# EAGLE board Led (EAGLE 5.06)
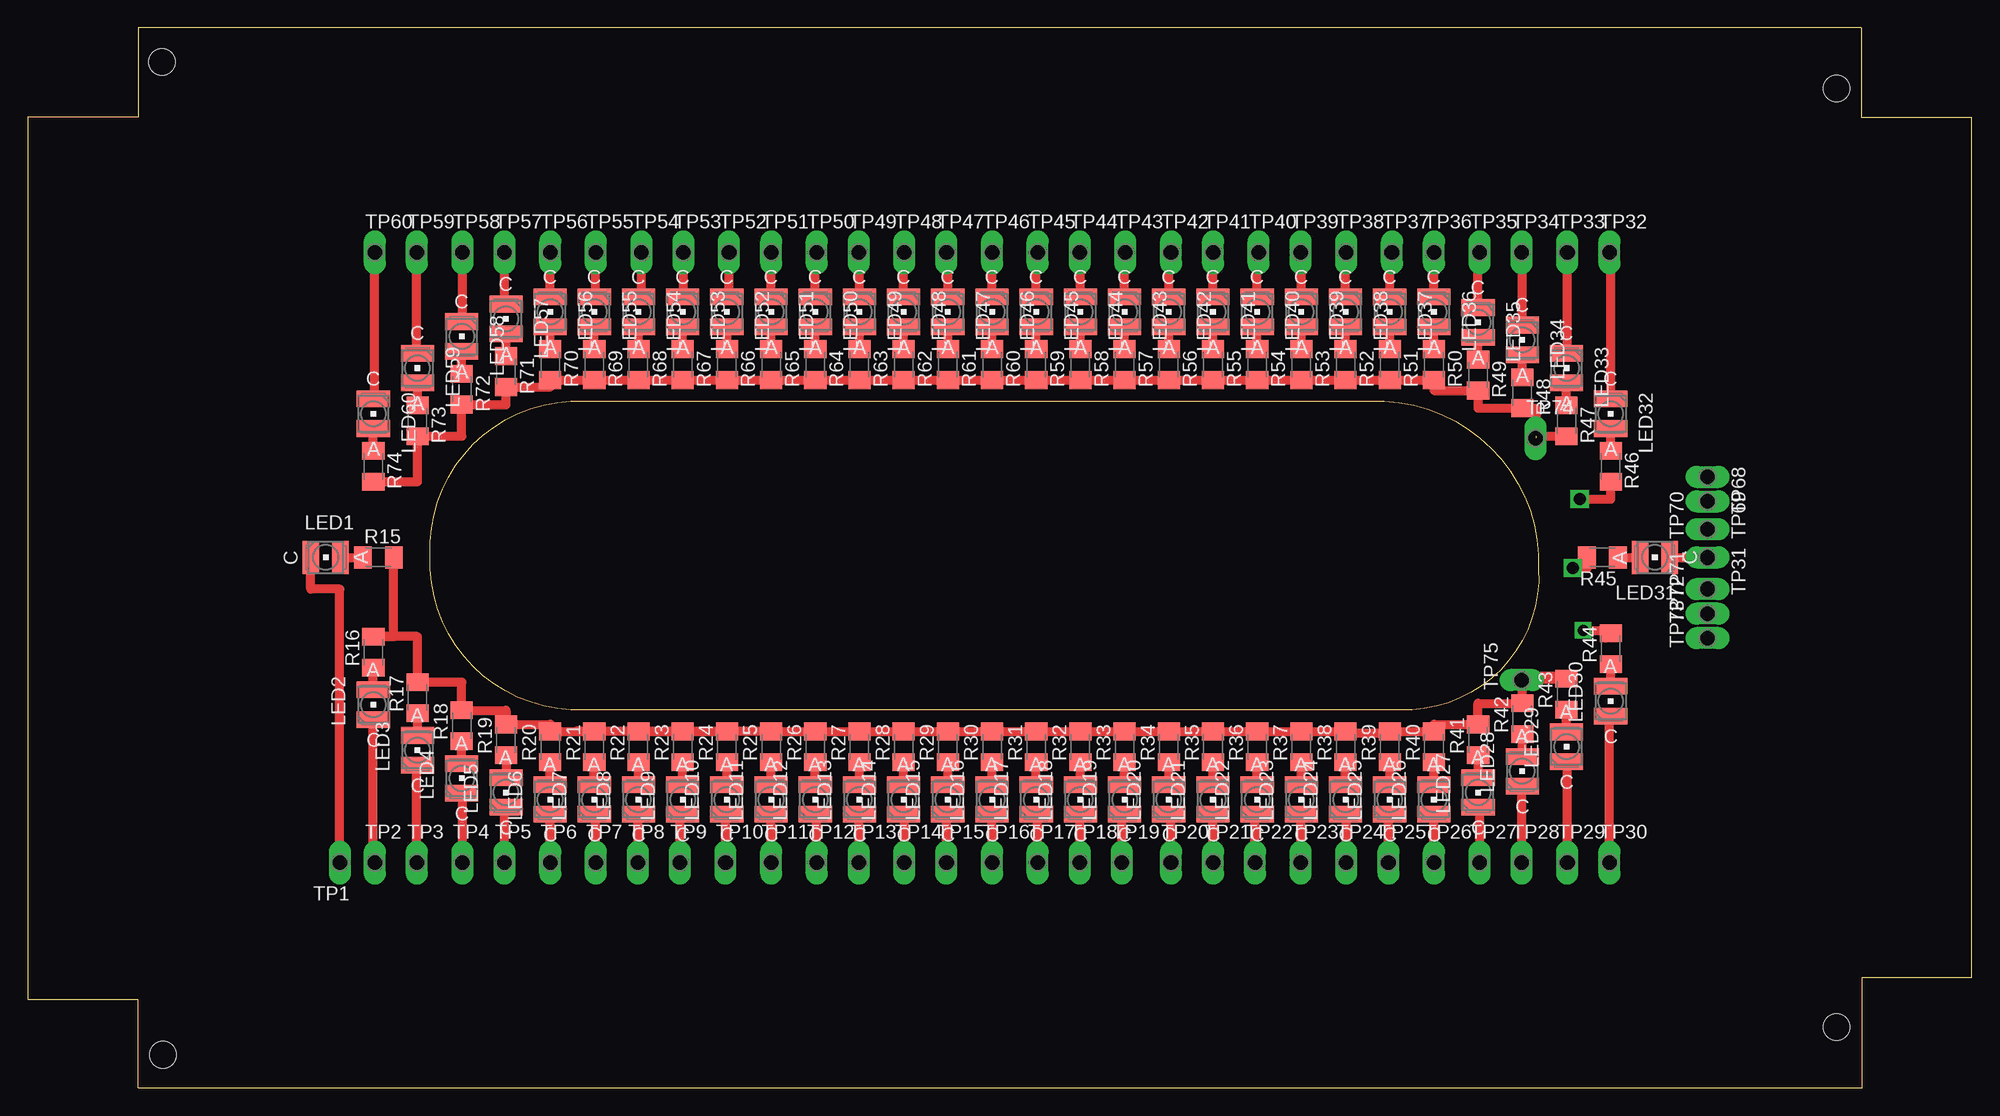
[diagram p0: board, top side]

Size 176 x 96 mm. Coordinates in mm from the lower left corner, seen from the top.
Outline: 10,0 166.1,0 166.1,10 176,10 176,87.9 166,87.9 166,96 10,96 10,87.9 0,87.9 0,8 10,8 10,0
Copper layers (1*16): Top 0.035mm / dielectric 1.5mm / Bottom 0.035mm
Design rules "default": minimum track width 10mil, minimum drill 24mil, track to track 8mil, track to pad 8mil, pad to pad 8mil, via to via 8mil, smd to smd 8mil, copper to edge 40mil, drill to drill 8mil, minimum pad ring 10mil, minimum via ring 8mil, stop-mask expansion 4mil, vias tented up to drill 0mil, thermal gap 10mil
Holes 2.4 mm at 12.25,3 12.15,92.9 163.75,90.5 163.75,5.5
Milling: 6 lines

## Footprints (pad centres in the part's own frame; a part is rotated, then mirrored left to right if it is on the bottom)
PLCC2 = smd 3 x 1.5: A 0,1.35; C 0,-1.35
M1206 = smd 1.6 x 2: 1 -1.4,0; 2 1.4,0
P1-13Y = drill 1.321 pad 1.905 long: 1 0,0

## Placement (x,y rotation side)
LED1  [PLCC2]  26.98,48.03 270 top
LED2  [PLCC2]  31.3,34.69 0 top
LED3  [PLCC2]  35.3,30.57 0 top
LED4  [PLCC2]  39.3,28.03 0 top
LED5  [PLCC2]  43.3,26.75 0 top
LED6  [PLCC2]  47.3,26.12 0 top
LED7  [PLCC2]  51.3,26.12 0 top
LED8  [PLCC2]  55.3,26.12 0 top
LED9  [PLCC2]  59.3,26.12 0 top
LED10  [PLCC2]  63.3,26.12 0 top
LED11  [PLCC2]  67.3,26.12 0 top
LED12  [PLCC2]  71.3,26.12 0 top
LED13  [PLCC2]  75.3,26.12 0 top
LED14  [PLCC2]  79.3,26.12 0 top
LED15  [PLCC2]  83.3,26.12 0 top
LED16  [PLCC2]  87.3,26.12 0 top
LED17  [PLCC2]  91.3,26.12 0 top
LED18  [PLCC2]  95.3,26.12 0 top
LED19  [PLCC2]  99.3,26.12 0 top
LED20  [PLCC2]  103.3,26.12 0 top
LED21  [PLCC2]  107.3,26.12 0 top
LED22  [PLCC2]  111.3,26.12 0 top
LED23  [PLCC2]  115.3,26.12 0 top
LED24  [PLCC2]  119.3,26.12 0 top
LED25  [PLCC2]  123.3,26.12 0 top
LED26  [PLCC2]  127.3,26.12 0 top
LED27  [PLCC2]  131.3,26.75 0 top
LED28  [PLCC2]  135.3,28.66 0 top
LED29  [PLCC2]  139.3,30.88 0 top
LED30  [PLCC2]  143.3,35.01 0 top
LED31  [PLCC2]  147.3,48.03 90 top
LED32  [PLCC2]  143.3,61.05 180 top
LED33  [PLCC2]  139.3,65.17 180 top
LED34  [PLCC2]  135.3,67.71 180 top
LED35  [PLCC2]  131.3,69.3 180 top
LED36  [PLCC2]  127.3,70.25 180 top
LED37  [PLCC2]  123.3,70.25 180 top
LED38  [PLCC2]  119.3,70.25 180 top
LED39  [PLCC2]  115.3,70.25 180 top
LED40  [PLCC2]  111.3,70.25 180 top
LED41  [PLCC2]  107.3,70.25 180 top
LED42  [PLCC2]  103.3,70.25 180 top
LED43  [PLCC2]  99.3,70.25 180 top
LED44  [PLCC2]  95.3,70.25 180 top
LED45  [PLCC2]  91.3,70.25 180 top
LED46  [PLCC2]  87.3,70.25 180 top
LED47  [PLCC2]  83.3,70.25 180 top
LED48  [PLCC2]  79.3,70.25 180 top
LED49  [PLCC2]  75.3,70.25 180 top
LED50  [PLCC2]  71.3,70.25 180 top
LED51  [PLCC2]  67.3,70.25 180 top
LED52  [PLCC2]  63.3,70.25 180 top
LED53  [PLCC2]  59.3,70.25 180 top
LED54  [PLCC2]  55.3,70.25 180 top
LED55  [PLCC2]  51.3,70.25 180 top
LED56  [PLCC2]  47.3,70.25 180 top
LED57  [PLCC2]  43.3,69.62 180 top
LED58  [PLCC2]  39.3,68.03 180 top
LED59  [PLCC2]  35.3,65.17 180 top
LED60  [PLCC2]  31.3,61.05 180 top
R15  [M1206]  31.75,48.03 0 top
R16  [M1206]  31.3,39.45 90 top
R17  [M1206]  35.3,35.33 90 top
R18  [M1206]  39.3,32.79 90 top
R19  [M1206]  43.3,31.52 90 top
R20  [M1206]  47.3,30.88 90 top
R21  [M1206]  51.3,30.88 90 top
R22  [M1206]  55.3,30.88 90 top
R23  [M1206]  59.3,30.88 90 top
R24  [M1206]  63.3,30.88 90 top
R25  [M1206]  67.3,30.88 90 top
R26  [M1206]  71.3,30.88 90 top
R27  [M1206]  75.3,30.88 90 top
R28  [M1206]  79.3,30.88 90 top
R29  [M1206]  83.3,30.88 90 top
R30  [M1206]  87.3,30.88 90 top
R31  [M1206]  91.3,30.88 90 top
R32  [M1206]  95.3,30.88 90 top
R33  [M1206]  99.3,30.88 90 top
R34  [M1206]  103.3,30.88 90 top
R35  [M1206]  107.3,30.88 90 top
R36  [M1206]  111.3,30.88 90 top
R37  [M1206]  115.3,30.88 90 top
R38  [M1206]  119.3,30.88 90 top
R39  [M1206]  123.3,30.88 90 top
R40  [M1206]  127.3,30.88 90 top
R41  [M1206]  131.3,31.52 90 top
R42  [M1206]  135.3,33.42 90 top
R43  [M1206]  139.3,35.65 90 top
R44  [M1206]  143.3,39.77 90 top
R45  [M1206]  142.55,48.03 180 top
R46  [M1206]  143.3,56.28 270 top
R47  [M1206]  139.3,60.41 270 top
R48  [M1206]  135.3,62.95 270 top
R49  [M1206]  131.3,64.54 270 top
R50  [M1206]  127.3,65.49 270 top
R51  [M1206]  123.3,65.49 270 top
R52  [M1206]  119.3,65.49 270 top
R53  [M1206]  115.3,65.49 270 top
R54  [M1206]  111.3,65.49 270 top
R55  [M1206]  107.3,65.49 270 top
R56  [M1206]  103.3,65.49 270 top
R57  [M1206]  99.3,65.49 270 top
R58  [M1206]  95.3,65.49 270 top
R59  [M1206]  91.3,65.49 270 top
R60  [M1206]  87.3,65.49 270 top
R61  [M1206]  83.3,65.49 270 top
R62  [M1206]  79.3,65.49 270 top
R63  [M1206]  75.3,65.49 270 top
R64  [M1206]  71.3,65.49 270 top
R65  [M1206]  67.3,65.49 270 top
R66  [M1206]  63.3,65.49 270 top
R67  [M1206]  59.3,65.49 270 top
R68  [M1206]  55.3,65.49 270 top
R69  [M1206]  51.3,65.49 270 top
R70  [M1206]  47.3,65.49 270 top
R71  [M1206]  43.3,64.86 270 top
R72  [M1206]  39.3,63.27 270 top
R73  [M1206]  35.3,60.41 270 top
R74  [M1206]  31.3,56.28 270 top
TP1  PTR1PAD1-13Y  [P1-13Y]  28.25,20.41 180 top
TP2  PTR1PAD1-13Y  [P1-13Y]  31.43,20.41 0 top
TP3  PTR1PAD1-13Y  [P1-13Y]  35.24,20.41 0 top
TP4  PTR1PAD1-13Y  [P1-13Y]  39.36,20.41 0 top
TP5  PTR1PAD1-13Y  [P1-13Y]  43.17,20.41 0 top
TP6  PTR1PAD1-13Y  [P1-13Y]  47.3,20.41 0 top
TP7  PTR1PAD1-13Y  [P1-13Y]  51.43,20.41 0 top
TP8  PTR1PAD1-13Y  [P1-13Y]  55.24,20.41 0 top
TP9  PTR1PAD1-13Y  [P1-13Y]  59.05,20.41 0 top
TP10  PTR1PAD1-13Y  [P1-13Y]  63.18,20.41 0 top
TP11  PTR1PAD1-13Y  [P1-13Y]  67.3,20.41 0 top
TP12  PTR1PAD1-13Y  [P1-13Y]  71.43,20.41 0 top
TP13  PTR1PAD1-13Y  [P1-13Y]  75.24,20.41 0 top
TP14  PTR1PAD1-13Y  [P1-13Y]  79.37,20.41 0 top
TP15  PTR1PAD1-13Y  [P1-13Y]  83.18,20.41 0 top
TP16  PTR1PAD1-13Y  [P1-13Y]  87.31,20.41 0 top
TP17  PTR1PAD1-13Y  [P1-13Y]  91.44,20.41 0 top
TP18  PTR1PAD1-13Y  [P1-13Y]  95.24,20.41 0 top
TP19  PTR1PAD1-13Y  [P1-13Y]  99.05,20.41 0 top
TP20  PTR1PAD1-13Y  [P1-13Y]  103.5,20.41 0 top
TP21  PTR1PAD1-13Y  [P1-13Y]  107.31,20.41 0 top
TP22  PTR1PAD1-13Y  [P1-13Y]  111.12,20.41 0 top
TP23  PTR1PAD1-13Y  [P1-13Y]  115.25,20.41 0 top
TP24  PTR1PAD1-13Y  [P1-13Y]  119.38,20.41 0 top
TP25  PTR1PAD1-13Y  [P1-13Y]  123.19,20.41 0 top
TP26  PTR1PAD1-13Y  [P1-13Y]  127.31,20.41 0 top
TP27  PTR1PAD1-13Y  [P1-13Y]  131.44,20.41 0 top
TP28  PTR1PAD1-13Y  [P1-13Y]  135.25,20.41 0 top
TP29  PTR1PAD1-13Y  [P1-13Y]  139.38,20.41 0 top
TP30  PTR1PAD1-13Y  [P1-13Y]  143.19,20.41 0 top
TP31  PTR1PAD1-13Y  [P1-13Y]  152.08,48.03 270 top
TP32  PTR1PAD1-13Y  [P1-13Y]  143.19,75.65 0 top
TP33  PTR1PAD1-13Y  [P1-13Y]  139.38,75.65 0 top
TP34  PTR1PAD1-13Y  [P1-13Y]  135.25,75.65 0 top
TP35  PTR1PAD1-13Y  [P1-13Y]  131.44,75.65 0 top
TP36  PTR1PAD1-13Y  [P1-13Y]  127.31,75.65 0 top
TP37  PTR1PAD1-13Y  [P1-13Y]  123.5,75.65 0 top
TP38  PTR1PAD1-13Y  [P1-13Y]  119.38,75.65 0 top
TP39  PTR1PAD1-13Y  [P1-13Y]  115.25,75.65 0 top
TP40  PTR1PAD1-13Y  [P1-13Y]  111.44,75.65 0 top
TP41  PTR1PAD1-13Y  [P1-13Y]  107.31,75.65 0 top
TP42  PTR1PAD1-13Y  [P1-13Y]  103.5,75.65 0 top
TP43  PTR1PAD1-13Y  [P1-13Y]  99.37,75.65 0 top
TP44  PTR1PAD1-13Y  [P1-13Y]  95.24,75.65 0 top
TP45  PTR1PAD1-13Y  [P1-13Y]  91.44,75.65 0 top
TP46  PTR1PAD1-13Y  [P1-13Y]  87.31,75.65 0 top
TP47  PTR1PAD1-13Y  [P1-13Y]  83.18,75.65 0 top
TP48  PTR1PAD1-13Y  [P1-13Y]  79.37,75.65 0 top
TP49  PTR1PAD1-13Y  [P1-13Y]  75.24,75.65 0 top
TP50  PTR1PAD1-13Y  [P1-13Y]  71.43,75.65 0 top
TP51  PTR1PAD1-13Y  [P1-13Y]  67.3,75.65 0 top
TP52  PTR1PAD1-13Y  [P1-13Y]  63.49,75.65 0 top
TP53  PTR1PAD1-13Y  [P1-13Y]  59.37,75.65 0 top
TP54  PTR1PAD1-13Y  [P1-13Y]  55.56,75.65 0 top
TP55  PTR1PAD1-13Y  [P1-13Y]  51.43,75.65 0 top
TP56  PTR1PAD1-13Y  [P1-13Y]  47.3,75.65 0 top
TP57  PTR1PAD1-13Y  [P1-13Y]  43.17,75.65 0 top
TP58  PTR1PAD1-13Y  [P1-13Y]  39.36,75.65 0 top
TP59  PTR1PAD1-13Y  [P1-13Y]  35.24,75.65 0 top
TP60  PTR1PAD1-13Y  [P1-13Y]  31.43,75.65 0 top
TP68  PTR1PAD1-13Y  [P1-13Y]  152.08,55.33 270 top
TP69  PTR1PAD1-13Y  [P1-13Y]  152.08,53.11 270 top
TP70  PTR1PAD1-13Y  [P1-13Y]  152.08,50.57 90 top
TP71  PTR1PAD1-13Y  [P1-13Y]  152.08,45.17 90 top
TP72  PTR1PAD1-13Y  [P1-13Y]  152.08,42.95 90 top
TP73  PTR1PAD1-13Y  [P1-13Y]  152.08,40.73 90 top
TP74  PTR1PAD1-13Y  [P1-13Y]  136.52,58.82 0 top
TP75  PTR1PAD1-13Y  [P1-13Y]  135.25,36.91 90 top

## Library data of the parts
LED1-LED60 = extra_dev
R15-R74 = rcl
TP1-TP60 TP68-TP75 = testpad

## Nets
+5V: R47.2 R48.2 R49.2 R50.2 R51.2 R52.2 R53.2 R54.2 R55.2 R56.2 R57.2 R58.2 R59.2 R60.2 R61.2 R62.2 R63.2 R64.2 R65.2 R66.2 R67.2 R68.2 R69.2 R70.2 R71.2 R72.2 R73.2 R74.2 TP74.1
LED1: LED1.C TP1.1
LED2: LED2.C TP2.1
LED3: LED3.C TP3.1
LED4: LED4.C TP4.1
LED5: LED5.C TP5.1
LED6: LED6.C TP6.1
LED7: LED7.C TP7.1
LED8: LED8.C TP8.1
LED9: LED9.C TP9.1
LED10: LED10.C TP10.1
LED11: LED11.C TP11.1
LED12: LED12.C TP12.1
LED13: LED13.C TP13.1
LED14: LED14.C TP14.1
LED15: LED15.C TP15.1
LED16: LED16.C TP16.1
LED17: LED17.C TP17.1
LED18: LED18.C TP18.1
LED19: LED19.C TP19.1
LED20: LED20.C TP20.1
LED21: LED21.C TP21.1
LED22: LED22.C TP22.1
LED23: LED23.C TP23.1
LED24: LED24.C TP24.1
LED25: LED25.C TP25.1
LED26: LED26.C TP26.1
LED27: LED27.C TP27.1
LED28: LED28.C TP28.1
LED29: LED29.C TP29.1
LED30: LED30.C TP30.1
LED31: LED31.C TP31.1
LED32: LED32.C TP32.1
LED33: LED33.C TP33.1
LED34: LED34.C TP34.1
LED35: LED35.C TP35.1
LED36: LED36.C TP36.1
LED37: LED37.C TP37.1
LED38: LED38.C TP38.1
LED39: LED39.C TP39.1
LED40: LED40.C TP40.1
LED41: LED41.C TP41.1
LED42: LED42.C TP42.1
LED43: LED43.C TP43.1
LED44: LED44.C TP44.1
LED45: LED45.C TP45.1
LED46: LED46.C TP46.1
LED47: LED47.C TP47.1
LED48: LED48.C TP48.1
LED49: LED49.C TP49.1
LED50: LED50.C TP50.1
LED51: LED51.C TP51.1
LED52: LED52.C TP52.1
LED53: LED53.C TP53.1
LED54: LED54.C TP54.1
LED55: LED55.C TP55.1
LED56: LED56.C TP56.1
LED57: LED57.C TP57.1
LED58: LED58.C TP58.1
LED59: LED59.C TP59.1
LED60: LED60.C TP60.1
N$2: LED2.A R16.1
N$4: LED1.A R15.1
N$22: LED3.A R17.1
N$24: LED4.A R18.1
N$26: LED5.A R19.1
N$27: LED6.A R20.1
N$28: LED7.A R21.1
N$29: LED8.A R22.1
N$30: LED9.A R23.1
N$31: LED10.A R24.1
N$32: LED11.A R25.1
N$33: LED12.A R26.1
N$34: LED13.A R27.1
N$35: LED14.A R28.1
N$36: LED15.A R29.1
N$37: LED16.A R30.1
N$38: LED17.A R31.1
N$39: LED18.A R32.1
N$40: LED19.A R33.1
N$41: LED20.A R34.1
N$42: LED21.A R35.1
N$43: LED22.A R36.1
N$44: LED23.A R37.1
N$45: LED24.A R38.1
N$46: LED25.A R39.1
N$47: LED26.A R40.1
N$48: LED27.A R41.1
N$49: LED28.A R42.1
N$50: LED29.A R43.1
N$51: LED30.A R44.1
N$52: LED31.A R45.1
N$53: LED32.A R46.1
N$54: LED33.A R47.1
N$55: LED34.A R48.1
N$56: LED35.A R49.1
N$57: LED36.A R50.1
N$58: LED37.A R51.1
N$59: LED38.A R52.1
N$60: LED39.A R53.1
N$61: LED40.A R54.1
N$62: LED41.A R55.1
N$63: LED42.A R56.1
N$64: LED43.A R57.1
N$65: LED44.A R58.1
N$66: LED45.A R59.1
N$67: LED46.A R60.1
N$68: LED47.A R61.1
N$69: LED48.A R62.1
N$70: LED49.A R63.1
N$71: LED50.A R64.1
N$72: LED51.A R65.1
N$73: LED52.A R66.1
N$74: LED53.A R67.1
N$75: LED54.A R68.1
N$76: LED55.A R69.1
N$77: LED56.A R70.1
N$78: LED57.A R71.1
N$79: LED58.A R72.1
N$80: LED59.A R73.1
N$81: LED60.A R74.1
S$2: R15.2 R16.2 R17.2 R18.2 R19.2 R20.2 R21.2
S$3: R44.2
S$4: R45.2
S$5: R46.2
S$6: R25.2 R26.2 R27.2 R28.2 R29.2 R30.2 R31.2 R32.2 R33.2 R34.2 R35.2 R36.2 R37.2 R38.2 R39.2 R40.2 R41.2 R42.2 R43.2 TP75.1
S$7: R22.2 R23.2 R24.2

## Tracks (layer width: path | path; a pad name or v marks a point on that pad's centre or on a via)
+5V  (1 unrouted)
  Top 0.813: R47.2 136.52,59.01 136.52,61.55 R48.2 131.3,61.55 R49.2 127.3,63.14 R50.2 R51.2 R52.2 R53.2 R54.2 R55.2 R56.2 R57.2 R58.2 R59.2 R60.2 R61.2 R62.2 R63.2 R64.2 R65.2 R66.2 R67.2 R68.2 R69.2 R70.2 47.3,63.45 R71.2 43.3,61.87 R72.2 39.3,59.01 R73.2 35.3,54.88 R74.2
LED1
  Top 0.813: LED1.C 25.63,45.17 28.25,45.17 TP1.1
LED2
  Top 0.813: LED2.C 31.3,20.41 TP2.1
LED3
  Top 0.813: TP3.1 35.24,29.21 LED3.C
LED4
  Top 0.813: TP4.1 39.36,26.68 LED4.C
LED5
  Top 0.813: TP5.1 43.17,25.41 LED5.C
LED6
  Top 0.813: TP6.1 LED6.C
LED7
  Top 0.813: TP7.1 51.43,24.77 LED7.C
LED8
  Top 0.813: TP8.1 55.24,24.77 LED8.C
LED9
  Top 0.813: TP9.1 59.05,24.77 LED9.C
LED10
  Top 0.813: TP10.1 63.18,24.77 LED10.C
LED11
  Top 0.813: TP11.1 LED11.C
LED12
  Top 0.813: TP12.1 71.43,24.77 LED12.C
LED13
  Top 0.813: TP13.1 75.24,24.77 LED13.C
LED14
  Top 0.813: TP14.1 79.37,24.77 LED14.C
LED15
  Top 0.813: TP15.1 83.18,24.77 LED15.C
LED16
  Top 0.813: TP16.1 LED16.C
LED17
  Top 0.813: TP17.1 91.44,24.77 LED17.C
LED18
  Top 0.813: TP18.1 95.24,24.77 LED18.C
LED19
  Top 0.813: TP19.1 99.05,24.77 LED19.C
LED20
  Top 0.813: TP20.1 103.5,24.77 LED20.C
LED21
  Top 0.813: TP21.1 LED21.C
LED22
  Top 0.813: TP22.1 111.12,24.77 LED22.C
LED23
  Top 0.813: TP23.1 115.25,24.77 LED23.C
LED24
  Top 0.813: TP24.1 119.38,24.77 LED24.C
LED25
  Top 0.813: TP25.1 123.19,24.77 LED25.C
LED26
  Top 0.813: TP26.1 LED26.C
LED27
  Top 0.813: TP27.1 131.44,25.41 LED27.C
LED28
  Top 0.813: TP28.1 135.25,27.31 LED28.C
LED29
  Top 0.813: TP29.1 139.38,29.53 LED29.C
LED30
  Top 0.813: TP30.1 143.19,33.66 LED30.C
LED31
  Top 0.813: LED31.C TP31.1
LED32
  Top 0.813: LED32.C 143.3,75.65 TP32.1
LED33
  Top 0.813: TP33.1 139.38,66.52 LED33.C
LED34
  Top 0.813: LED34.C 135.3,75.65 TP34.1
LED35
  Top 0.813: LED35.C 131.3,75.65 TP35.1
LED36
  Top 0.813: LED36.C 127.3,75.65 TP36.1
LED37
  Top 0.813: LED37.C 123.3,75.65 TP37.1
LED38
  Top 0.813: LED38.C 119.3,75.65 TP38.1
LED39
  Top 0.813: LED39.C 115.3,75.65 TP39.1
LED40
  Top 0.813: LED40.C 111.3,75.65 TP40.1
LED41
  Top 0.813: LED41.C 107.3,75.65 TP41.1
LED42
  Top 0.813: LED42.C 103.3,75.65 TP42.1
LED43
  Top 0.813: LED43.C 99.3,75.65 TP43.1
LED44
  Top 0.813: LED44.C 95.3,75.65 TP44.1
LED45
  Top 0.813: LED45.C 91.3,75.65 TP45.1
LED46
  Top 0.813: LED46.C TP46.1
LED47
  Top 0.813: LED47.C 83.3,75.65 TP47.1
LED48
  Top 0.813: LED48.C 79.3,75.65 TP48.1
LED49
  Top 0.813: LED49.C 75.3,75.65 TP49.1
LED50
  Top 0.813: LED50.C 71.3,75.65 TP50.1
LED51
  Top 0.813: LED51.C TP51.1
LED52
  Top 0.813: TP52.1 63.5,71.6 LED52.C
LED53
  Top 0.813: TP53.1 59.37,71.6 LED53.C
LED54
  Top 0.813: TP54.1 55.56,71.6 LED54.C
LED55
  Top 0.813: TP55.1 51.43,71.6 LED55.C
LED56
  Top 0.813: TP56.1 LED56.C
LED57
  Top 0.813: TP57.1 43.17,70.97 LED57.C
LED58
  Top 0.813: TP58.1 39.36,69.38 LED58.C
LED59
  Top 0.813: TP59.1 35.24,66.52 LED59.C
LED60
  Top 0.813: TP60.1 31.43,62.4 LED60.C
N$2
  Top 0.813: LED2.A R16.1
N$4
  Top 0.813: 27.94,48.03 LED1.A R15.1
N$22
  Top 0.813: LED3.A R17.1
N$24
  Top 0.813: LED4.A R18.1
N$26
  Top 0.813: R19.1 LED5.A
N$27
  Top 0.813: LED6.A R20.1
N$28
  Top 0.813: LED7.A R21.1
N$29
  Top 0.813: LED8.A R22.1
N$30
  Top 0.813: LED9.A R23.1
N$31
  Top 0.813: LED10.A R24.1
N$32
  Top 0.813: LED11.A R25.1
N$33
  Top 0.813: LED12.A R26.1
N$34
  Top 0.813: LED13.A R27.1
N$35
  Top 0.813: LED14.A R28.1
N$36
  Top 0.813: LED15.A R29.1
N$37
  Top 0.813: LED16.A R30.1
N$38
  Top 0.813: LED17.A R31.1
N$39
  Top 0.813: LED18.A R32.1
N$40
  Top 0.813: LED19.A R33.1
N$41
  Top 0.813: LED20.A R34.1
N$42
  Top 0.813: LED21.A R35.1
N$43
  Top 0.813: LED22.A R36.1
N$44
  Top 0.813: LED23.A R37.1
N$45
  Top 0.813: LED24.A R38.1
N$46
  Top 0.813: LED25.A R39.1
N$47
  Top 0.813: LED26.A R40.1
N$48
  Top 0.813: R41.1 LED27.A
N$49
  Top 0.813: LED28.A R42.1
N$50
  Top 0.813: LED29.A R43.1
N$51
  Top 0.813: LED30.A R44.1
N$52
  Top 0.813: R45.1 LED31.A
N$53
  Top 0.813: 143.19,59.46 143.3,59.46 LED32.A R46.1
N$54
  Top 0.813: R47.1 LED33.A
N$55
  Top 0.813: R48.1 LED34.A
N$56
  Top 0.813: R49.1 LED35.A
N$57
  Top 0.813: R50.1 LED36.A
N$58
  Top 0.813: R51.1 LED37.A
N$59
  Top 0.813: R52.1 LED38.A
N$60
  Top 0.813: R53.1 LED39.A
N$61
  Top 0.813: R54.1 LED40.A
N$62
  Top 0.813: R55.1 LED41.A
N$63
  Top 0.813: R56.1 LED42.A
N$64
  Top 0.813: R57.1 LED43.A
N$65
  Top 0.813: R58.1 LED44.A
N$66
  Top 0.813: R59.1 LED45.A
N$67
  Top 0.813: R60.1 LED46.A
N$68
  Top 0.813: R61.1 LED47.A
N$69
  Top 0.813: R62.1 LED48.A
N$70
  Top 0.813: R63.1 LED49.A
N$71
  Top 0.813: R64.1 LED50.A
N$72
  Top 0.813: R65.1 LED51.A
N$73
  Top 0.813: R66.1 LED52.A
N$74
  Top 0.813: R67.1 LED53.A
N$75
  Top 0.813: R68.1 LED54.A
N$76
  Top 0.813: R69.1 LED55.A
N$77
  Top 0.813: R70.1 LED56.A
N$78
  Top 0.813: R71.1 LED57.A
N$79
  Top 0.813: R72.1 LED58.A
N$80
  Top 0.813: R73.1 LED59.A
N$81
  Top 0.813: R74.1 LED60.A
S$1
  Top 0.813: 49.78,32.34 67.88,32.34
S$2
  Top 0.813: R15.2 33.14,40.86 R16.2 35.3,40.86 R17.2 39.3,36.73 R18.2 43.3,34.19 R19.2 47.3,32.92 R20.2 R21.2
S$3  (via drill 1 pad 1.42)
  Top 0.813: R44.2 142.85,40.73 142.85,41.44 v140.81,41.44
S$4  (via drill 1.1 pad 1.42)
  Top 0.813: v139.87,47.06 141.15,47.06 R45.2
S$5  (via drill 1.1 pad 1.42)
  Top 0.813: R46.2 143.3,53.31 v140.5,53.31 140.5,53.42
S$6
  Top 0.813: 136.52,37.23 139.3,37.23 R43.2 135.3,37.05 135.3,36.75 | TP75.1 135.25,36.75 135.3,36.75 | 135.3,36.75 R42.2 131.3,34.82 R41.2 127.3,32.92 R40.2 R39.2 123.3,32.15 118.74,32.15 118.74,32.28 R38.2 R37.2 R36.2 R35.2 R34.2 R33.2 R32.2 R31.2 R30.2 R29.2 R28.2 R27.2 R26.2 R25.2
S$7
  Top 0.813: R24.2 R23.2 R22.2